# Altium PCB Demo_PCB.PcbDoc
Units mm, origin at the board's own origin, x right, y up, seen from the top; angles counter-clockwise.
Board outline 50 x 35 mm, 4 copper layers (Top Layer, Internal1, Internal2, Bottom Layer), stack 1.615 mm thick; 75 components, 63 nets, 285 pads, 185 vias.
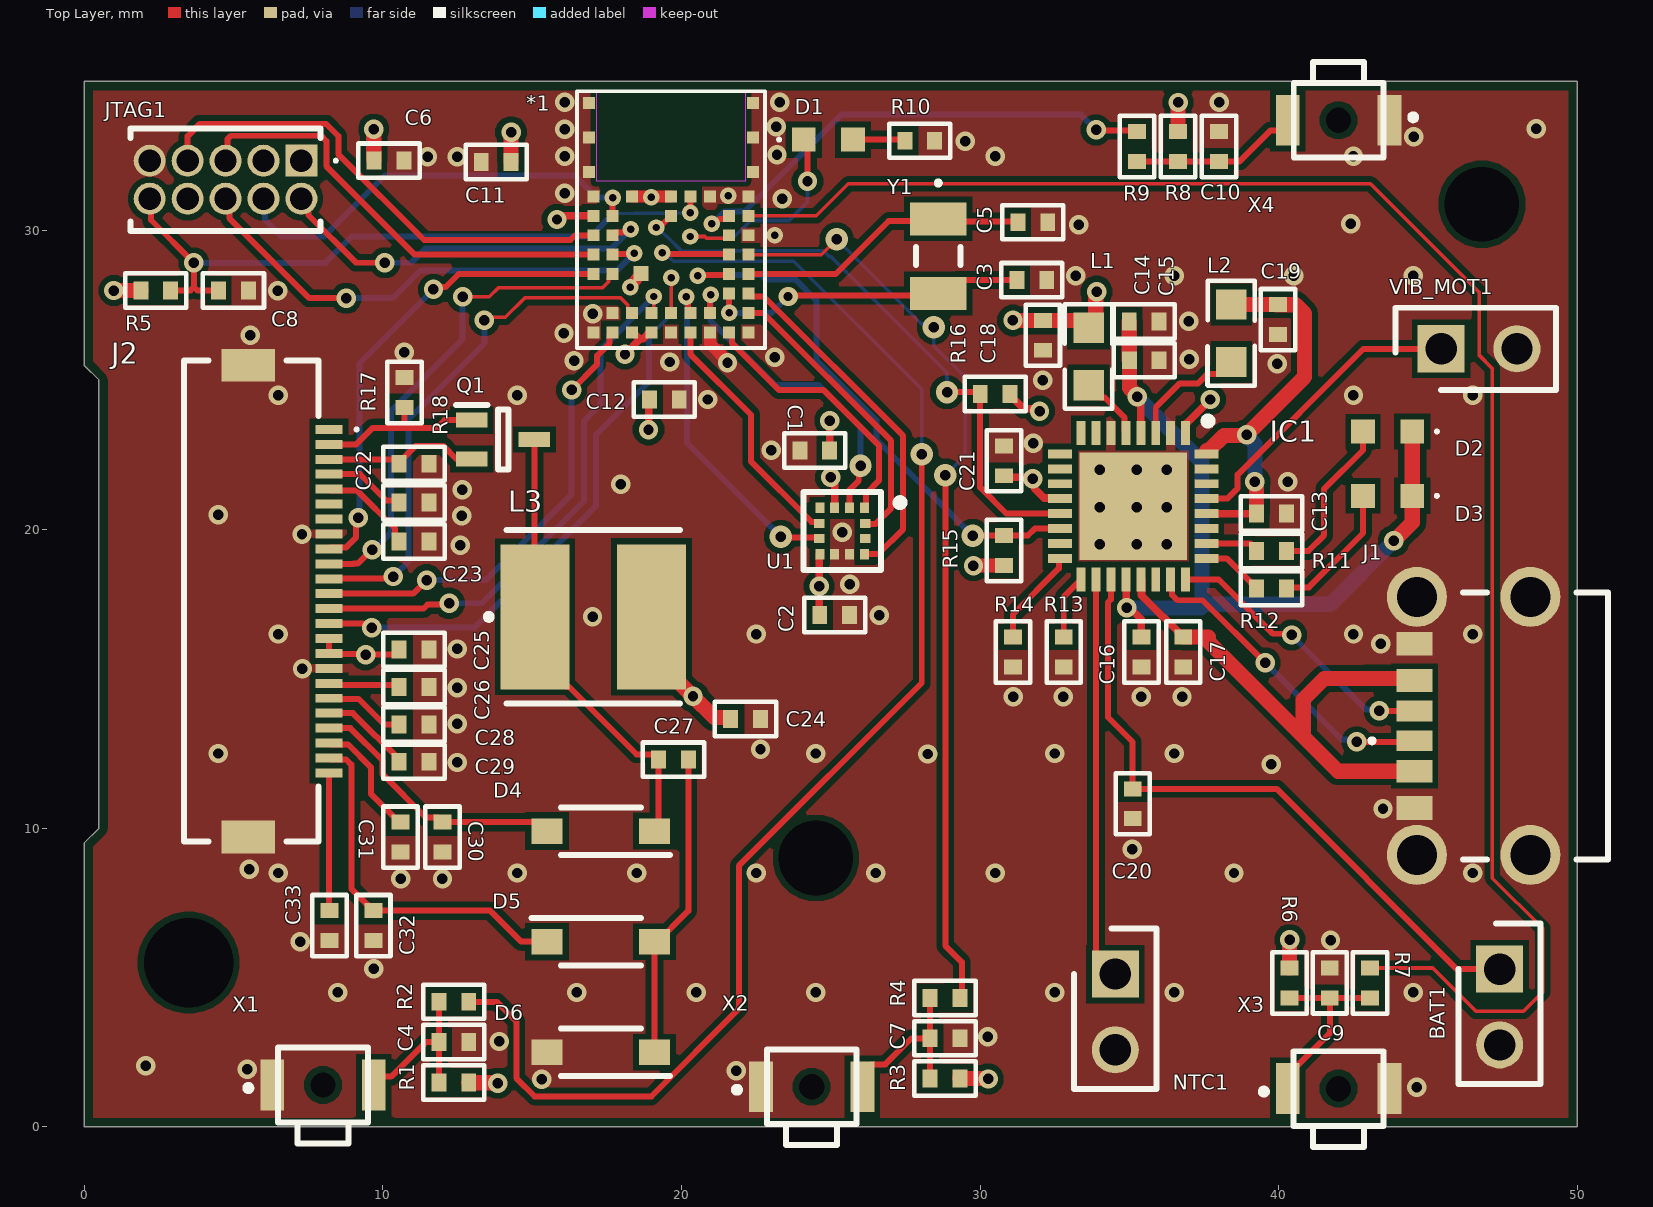
[diagram p0: Top Layer view]
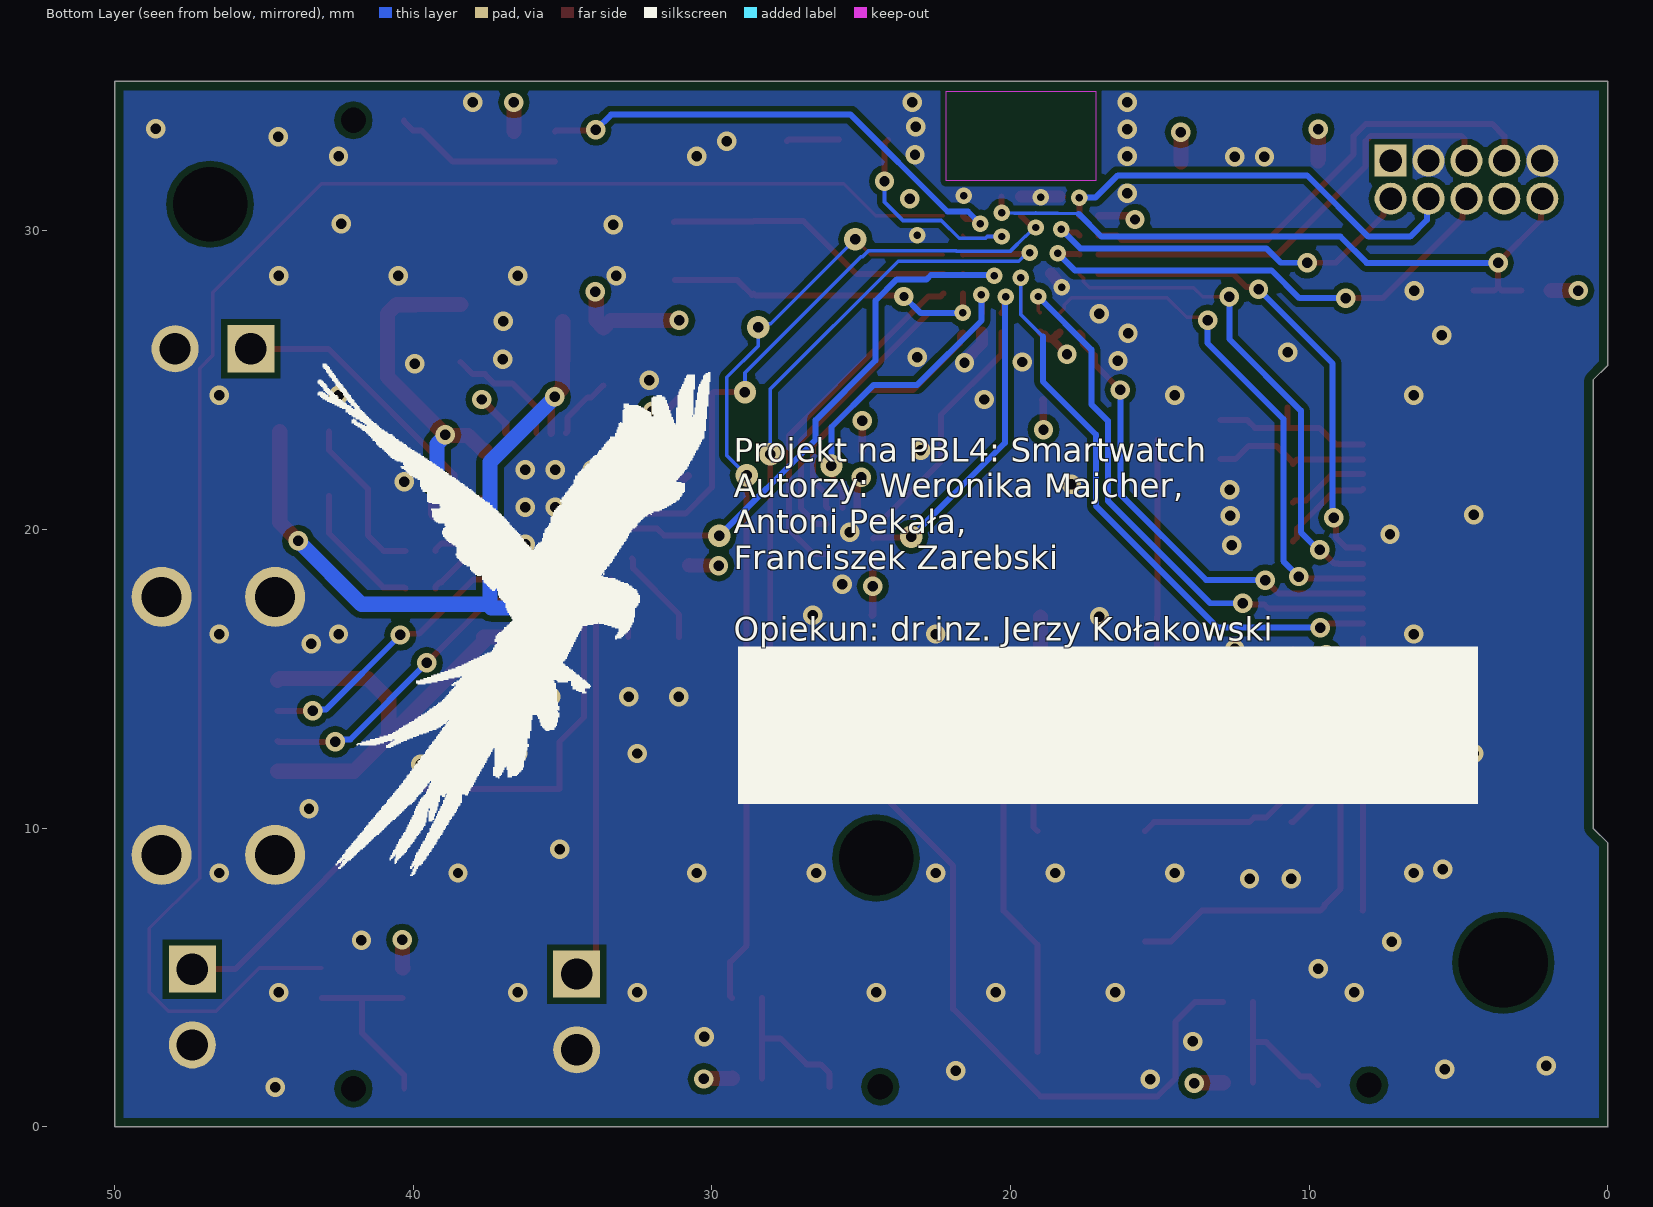
[diagram p1: Bottom Layer view, seen from below]
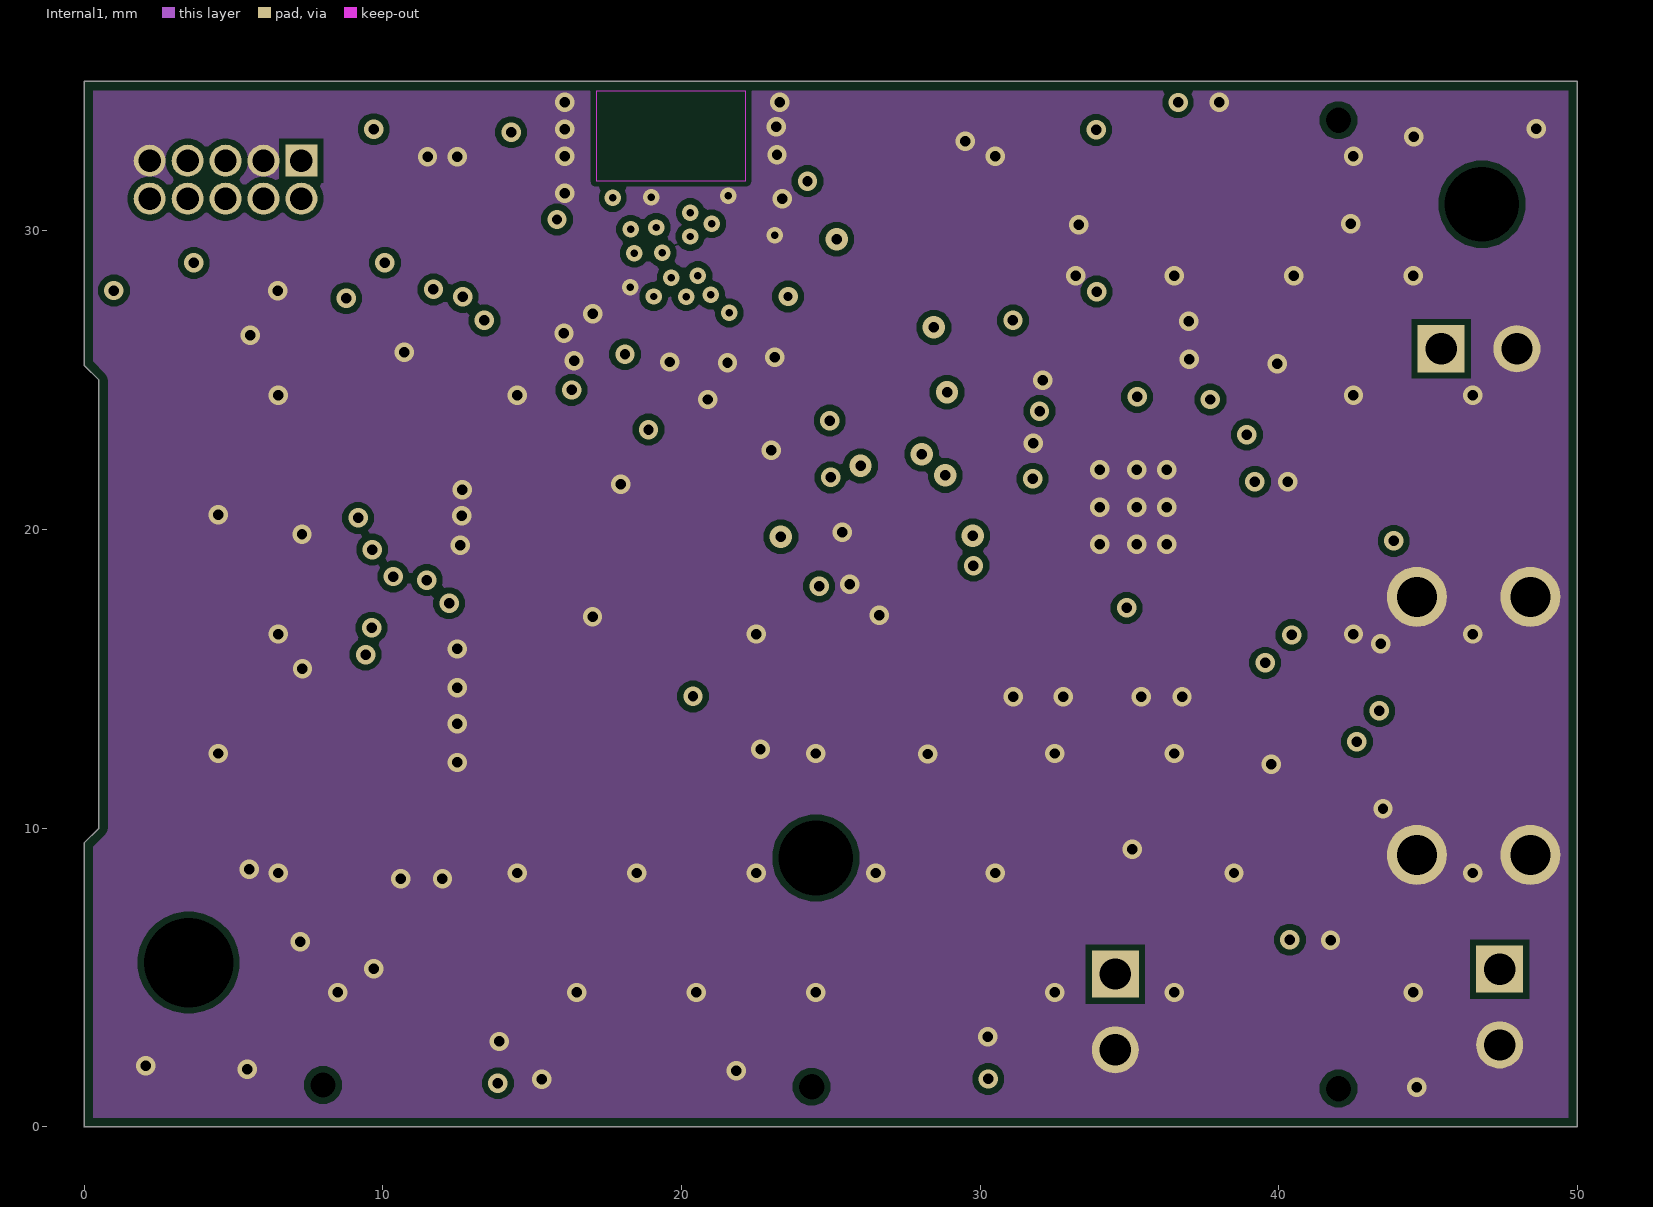
[diagram p2: Internal1]
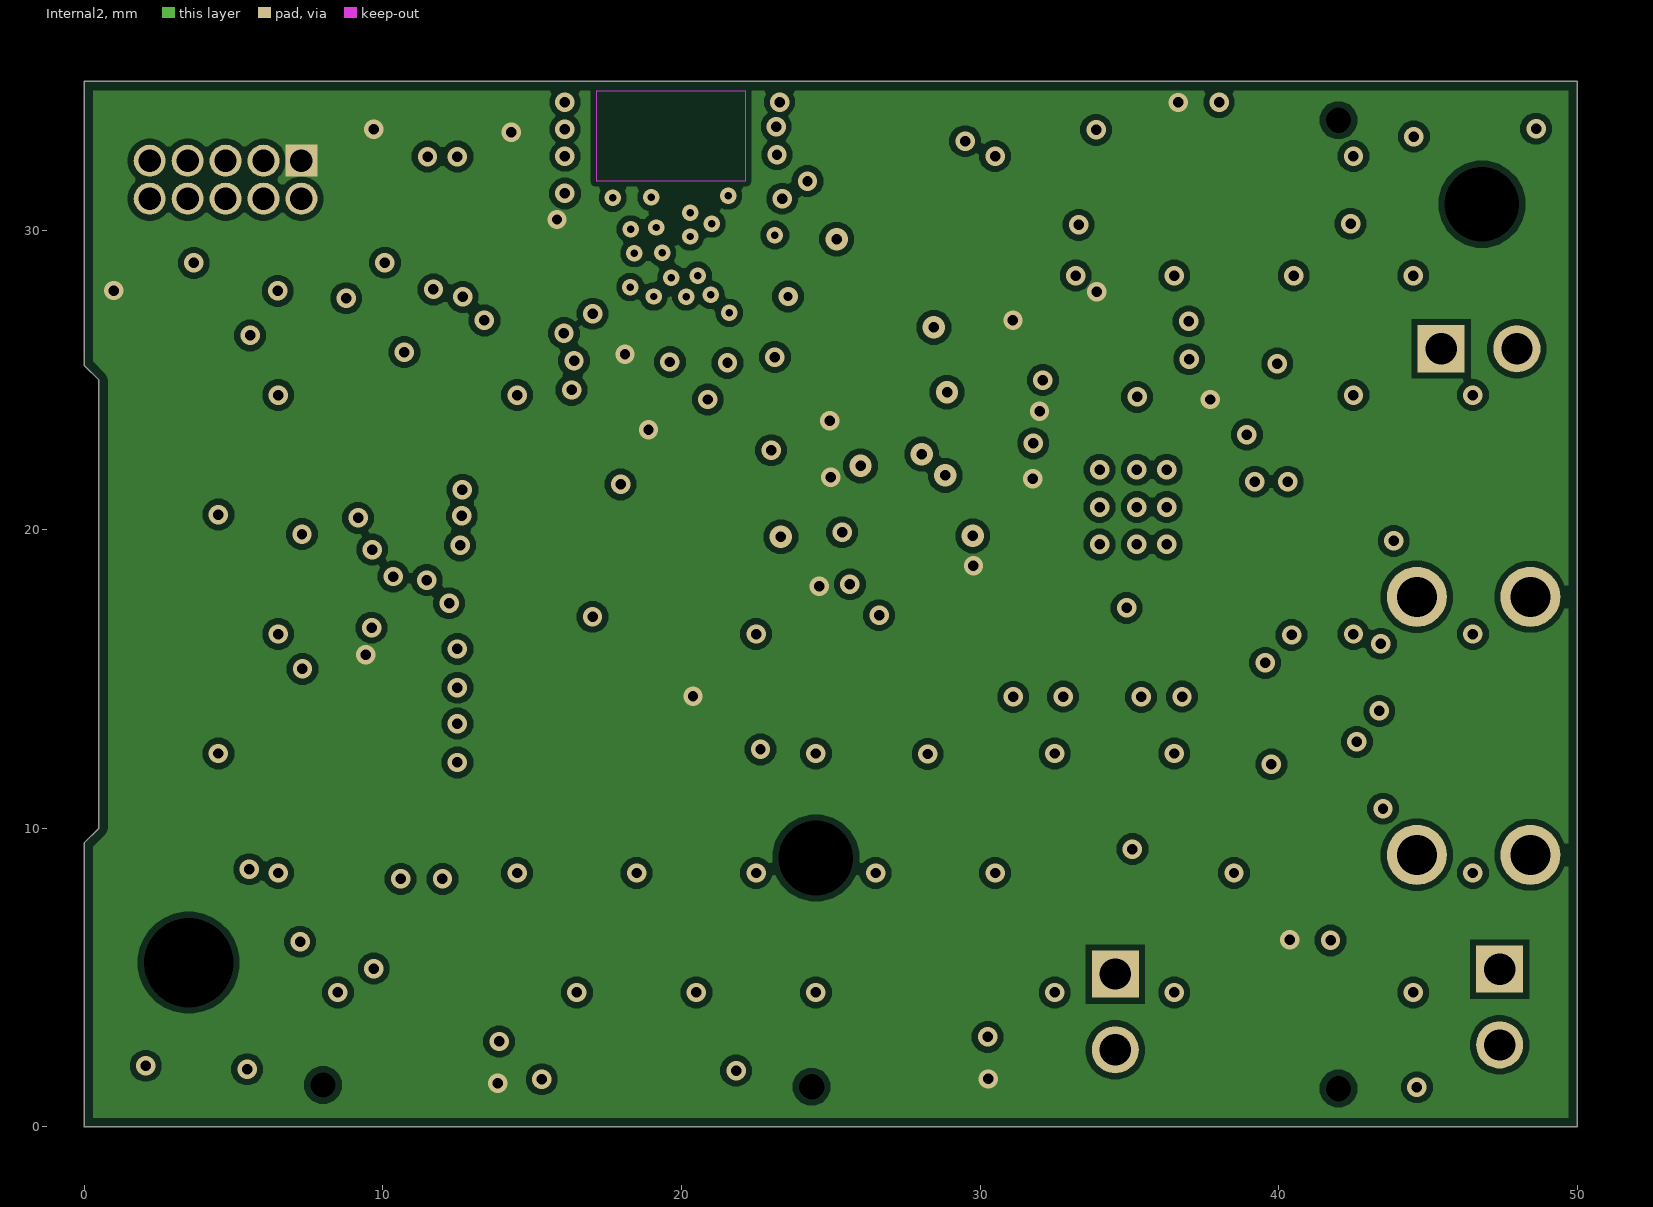
[diagram p3: Internal2]
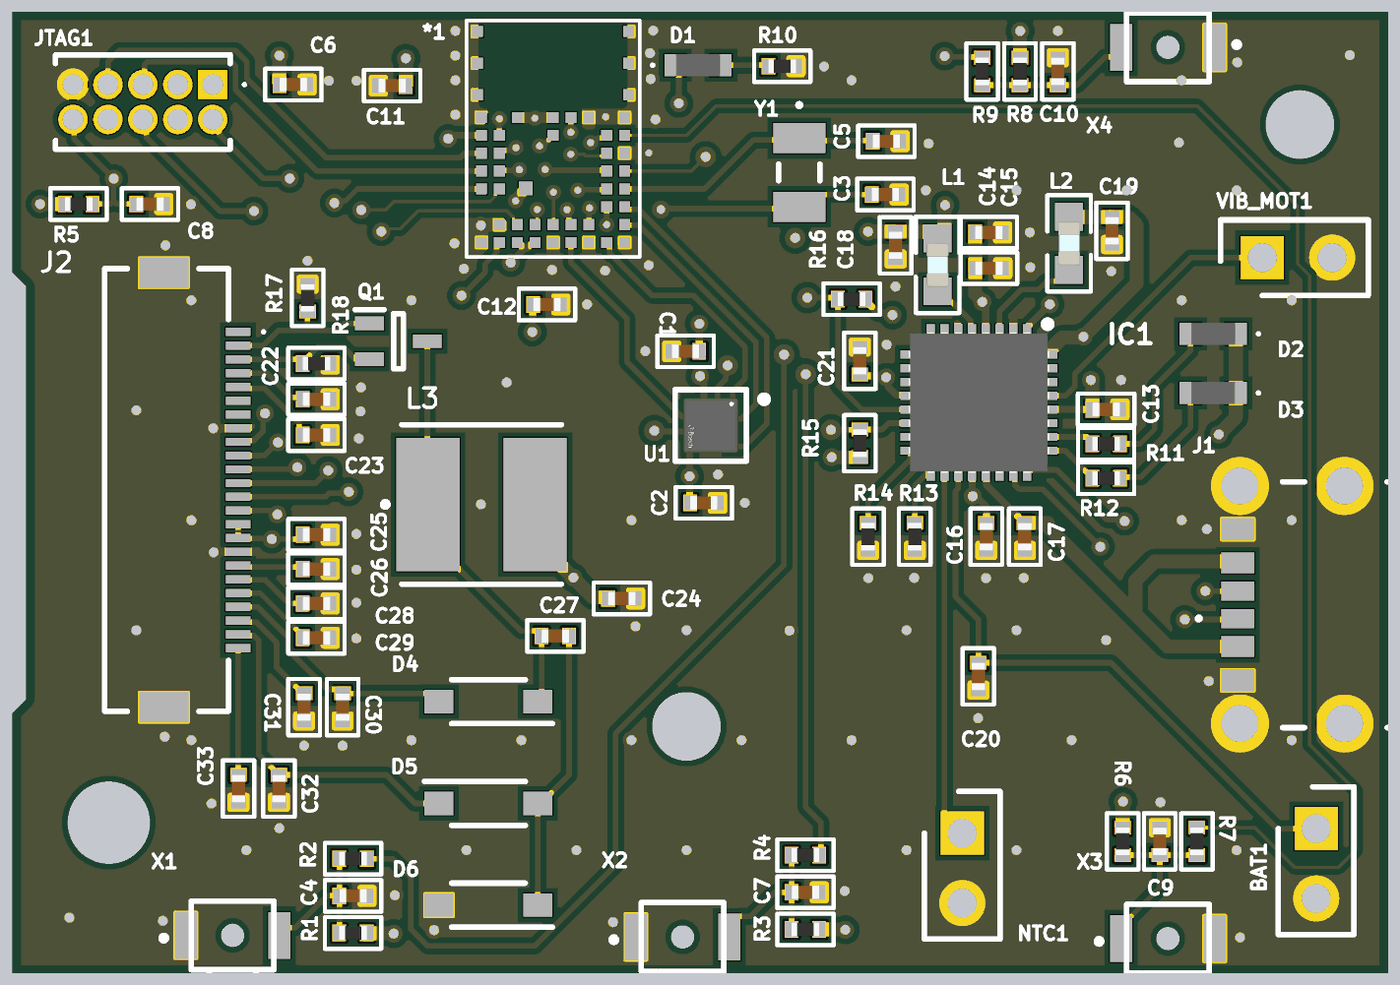
[diagram p4: 3D render of the assembled board from above, using the file's embedded part models]

## Layer stack, top to bottom
Top Solder: solder mask 0.0102, Solder Resist, Dk 3.5
Top Layer: signal copper 0.0175
Prepeg_Top1: prepreg 0.2, Dk 4.5
Prepeg_Top2: prepreg 0.2, Dk 4.5
Internal1: signal copper 0.035
Core Dielectric: core 0.71, FR4, Dk 4.8
Internal2: signal copper 0.035
Prepeg_Bottom1: prepreg 0.2, Dk 4.5
Prepeg_Bottom2: prepreg 0.2, Dk 4.5
Bottom Layer: signal copper 0.0175
Bottom Solder: solder mask 0.0102, Solder Resist, Dk 3.5

## Board outline
0,9.5 0.5,10 0.5,25 0,25.5 0,35 50,35 50,0 0.002,0 0.001,-0.001 0,0

## Design rules (kind name [scope] priority, off if disabled: settings)
BoardOutlineClearance [All] p1: gap=0.3 ignorepadtopadclearanceinfootprint=FALSE
Clearance Default [All] p1: gap=0.2 ignorepadtopadclearanceinfootprint=FALSE except(0.15: Arc-Via Track-Via SMDPad-Via THPad-Via Via-Via)
Clearance [All] p2: gap=0.12 ignorepadtopadclearanceinfootprint=FALSE except(0: Arc-Hole Track-Hole SMDPad-Hole THPad-Hole Via-Hole Fill-Hole Poly-Hole Region-Hole Text-Hole; 0.25: Track-Via Track-Fill Track-Poly Track-Region Track-Text)
HoleSize [All] p1: absolutevalues=TRUE maxlimit=6 minlimit=0.25 maxpercent=80.000 minpercent=20.000
HoleToHoleClearance [All] p1: gap=0.52 allowstackedmicrovias=TRUE
MinimumAnnularRing [All] p1: minimumring=0.15
MinimumSolderMaskSliver [All] p1: minsoldermaskwidth=0.1
PlaneClearance [All] p1: clearance=0.25
PlaneConnect [All] p1: planeconnectstyle=Relief reliefexpansion=0.2 reliefentries=4 reliefconductorwidth=0.25 reliefairgap=0.2
PolygonConnect PowerCircuits [InNet('No Net')] p1: connectstyle=Relief reliefconductorwidth=0.4 reliefentries=4 polygonreliefangle="90 Angle" airgapwidth=0.254
PolygonConnect [All] p2: connectstyle=Direct reliefconductorwidth=0.2 reliefentries=4 polygonreliefangle="45 Angle" airgapwidth=0.2
RoomDefinition zasilanie [InComponentClass('zasilanie')] p1: confinementstyle=ConfineOut formatcopy=TRUE lockcomponents=FALSE outline -27.5,-27.5 23.3,-27.5 23.3,-14.172 -27.5,-14.172
RoutingVias [All] p1: holewidth=0.35 width=0.75 viastyle="Through Hole" minholewidth=0.3 minwidth=0.7 maxholewidth=0.5 maxwidth=0.9
SilkToSilkClearance [All] p1: silktosilkclearance=0.12
SilkToSolderMaskClearance [IsPad] p1: minsilkscreentomaskgap=0.06 clearancetoexposedcopper=TRUE
SolderMaskExpansion [All] p1: expansion=0.05 istentingtop=FALSE
UnRoutedNet [All] p1: checkbadconnections=TRUE
Width [All] p1: maxlimit=1.5 minlimit=0.12 preferedwidth=0.2 midlayer1_prefwidth=0.15 midlayer2_prefwidth=0.15 minimp=50.000000 maximp=50.000000 favimp=50.000000
22 further rules are at their usual default settings.

## Classes and differential pairs
component class zasilanie: BAT1 C13 C14 C15 C16 C17 C18 C19 C20 C21 D2 D3 IC1 J1 L1 L2 NTC1 R11 R12 R13 R14 R15 R16 VIB_MOT1
component class BL653: *1 C3 C4 C5 C6 C7 C8 C9 C10 C11 C12 D1 JTAG1 R1 R2 R3 R4 R5 R6 R7 R8 R9 R10 X1 X2 X3 X4 Y1
component class accelerometer: C1 C2 U1
component class 1.54inch_e-Paper: C22 C23 C24 C25 C26 C27 C28 C29 C30 C31 C32 C33 D4 D5 D6 J2 L3 L? Q1 R17 R18

## Components (designator, comment, footprint, x,y, rotation, side; value= is the part's Value field where it differs from the comment)
*1 "BL653u" BL635U 19.65,29.168 r90 top
BAT1 "Battery" RHDR20W60P0X254_1X20_5130X250X888P 47.265,5.283 r270 top
C1 "100n" 0402_CAP_REFLOW 24.464,22.646 r180 top
C2 "100n" 0402_CAP_REFLOW 25.13,17.133 r180 top
C3 "18p" 0402_CAP_REFLOW 31.73,28.347 r180 top
C4 "100nF" 0402_CAP_REFLOW 12.381,2.838 r0 top
C5 "18p" 0402_CAP_REFLOW 31.765,30.287 r180 top
C6 "100nF" 0402_CAP_REFLOW 10.208,32.347 r0 top
C7 "100nF" 0402_CAP_REFLOW 28.825,2.966 r0 top
C8 "100nF" 0402_CAP_REFLOW 5,28 r0 top
C9 "100nF" 0402_CAP_REFLOW 41.707,4.82 r90 top
C10 "100nF" 0402_CAP_REFLOW 38,32.825 r90 top
C11 "100nF" 0402_CAP_REFLOW 13.798,32.307 r180 top
C12 "100nF" 0402_CAP_REFLOW 19.428,24.347 r0 top
C13 "10u" 0402_CAP_REFLOW 39.755,20.531 r180 top
C14 "10u" 0402_CAP_REFLOW 35.493,26.964 r0 top
C15 "10u" 0402_CAP_REFLOW 35.496,25.667 r0 top
C16 "10u" 0402_CAP_REFLOW 35.4,15.9 r270 top
C17 "1u" 0402_CAP_REFLOW 36.8,15.9 r270 top
C18 "10u" 0402_CAP_REFLOW 32.1,26.5 r270 top
C19 "10u" 0402_CAP_REFLOW 39.969,27.027 r270 top
C20 "2.2u" 0402_CAP_REFLOW 35.11,10.817 r270 top
C21 "100n" 0402_CAP_REFLOW 30.8,22.3 r90 top
C22 "1uF/ 50 V" 0402_CAP_REFLOW 11.05,20.9 r0 top
C23 "1uF/ 50 V" 0402_CAP_REFLOW 11.05,19.6 r0 top
C24 "4.7uF/50V" 0402_CAP_REFLOW 22.148,13.655 r0 top
C25 "1uF/25V" 0402_CAP_REFLOW 11.05,15.975 r0 top
C26 "1uF/ 50 V" 0402_CAP_REFLOW 11.05,14.725 r0 top
C27 "4.7uF/50V" 0402_CAP_REFLOW 19.733,12.293 r0 top
C28 "1uF/ 50 V" 0402_CAP_REFLOW 11.05,13.475 r180 top
C29 "1uF/ 50 V" 0402_CAP_REFLOW 11.05,12.225 r0 top
C30 "1uF/ 50 V" 0402_CAP_REFLOW 12,9.7 r270 top
C31 "1uF/ 50 V" 0402_CAP_REFLOW 10.6,9.7 r270 top
C32 "1uF/ 50 V" 0402_CAP_REFLOW 9.685,6.738 r270 top
C33 "1uF/ 50 V" 0402_CAP_REFLOW 8.214,6.738 r270 top
D1 "=Value" LED_G 24.92,33.051 r0 top
D2 "=Value" LED_G 43.644,23.28 r180 top
D3 "=Value" LED_G 43.642,21.127 r180 top
D4 "Diode MBR0530" SOD3716X135N 17.3,9.9 r180 top
D5 "Diode MBR0530" SOD3716X135N 17.3,6.2 r0 top
D6 "Diode MBR0530" SOD3716X135N 17.3,2.5 r180 top
IC1 "NPM1300-QEAA-R" nPM1300-QFN50P500X500X90-33N 35.13,20.781 r270 top
J1 "USB-C" USB-C 47.57,13.426 r90 top
J2 "F34G-1A7Q1-E8C24" F34G1A7Q1E8C24 5.775,17.6 r270 top
JTAG1 "20021111-00010T1LF" 2002111100010T1LF 7.278,32.347 r180 top
L1 "2.2u" 0603_IND_2.2u_30%_DCR<400m? 33.632,25.788 r90 top
L2 "2.2u" 0603_IND_2.2u_30%_DCR<400m? 38.41,26.57 r90 top
L3 "68uH" SRR5828A2R6Y 17.05,17.075 r90 top
NTC1 "Header 2" RHDR20W60P0X254_1X20_5130X250X888P 34.399,5.116 r270 top
Q1 "Si1308EDL-T1-GE3" SOT65P210X110-3N 14.028,23.011 r0 top
R1 "10k" 0402_RES_REFLOW 12.381,1.488 r180 top
R2 "1k" 0402_RES_REFLOW 12.381,4.188 r0 top
R3 "10k" 0402_RES_REFLOW 28.825,1.616 r180 top
R4 "1k" 0402_RES_REFLOW 28.825,4.316 r0 top
R5 "47K" 0402_RES_REFLOW 2.4,28 r0 top
R6 "10k" 0402_RES_REFLOW 40.357,4.82 r270 top
R7 "1k" 0402_RES_REFLOW 43.057,4.819 r90 top
R8 "10k" 0402_RES_REFLOW 36.625,32.825 r270 top
R9 "1k" 0402_RES_REFLOW 35.25,32.825 r90 top
R10 "1.69k" 0402_RES_REFLOW 27.98,33.014 r180 top
R11 "1.69k" 0402_RES_REFLOW 39.755,19.281 r180 top
R12 "1.69k" 0402_RES_REFLOW 39.755,18.031 r180 top
R13 "300k" 0402_RES_REFLOW 32.8,15.9 r90 top
R14 "300k" 0402_RES_REFLOW 31.1,15.9 r90 top
R15 "10K" 0402_RES_REFLOW 30.8,19.3 r270 top
R16 "10K" 0402_RES_REFLOW 30.504,24.54 r0 top
R17 "10K" 0402_RES_REFLOW 10.726,24.587 r270 top
R18 "3" 0402_RES_REFLOW 11.05,22.2 r0 top
U1 "BMA456" FP-BMA456-MFG 25.382,19.95 r180 top
VIB_MOT1 "vibration_motor_ODS-13807" RHDR20W60P0X254_1X20_5130X250X888P 45.433,25.923 r0 top
X1 "B3U-3000PM-B" B3U3000PMB 8,1.4 r180 top
X2 "B3U-3000PM-B" B3U3000PMB 24.359,1.342 r180 top
X3 "B3U-3000PM-B" B3U3000PMB 42,1.282 r180 top
X4 "B3U-3000PM-B" B3U3000PMB 42,33.7 r0 top
Y1 "ECS-.327-12.5-1210-TR" ECS32712534BCTR 28.6,29.15 r270 top

## Footprints (in the part's own frame and the unit in brackets; to place one, negate y for a bottom-side part, rotate by r counter-clockwise, add the part's x,y. Pads: shape width x height; smd on the part's side, far side on the other; paste and mask are expansions set on the pad)
0402_CAP_REFLOW [mm]
  rect 0.5x0.6 smd paste-0.03 mask+0.1: 1(0.5,0) 2(-0.5,0)
  silkscreen extent -1.02,-0.57 1.02,0.57, body extent -0.5,-0.25 0.5,0.25, height 0.5
0402_RES_REFLOW [mm]
  rect 0.5x0.6 smd paste-0.03 mask+0.1: 1(0.5,0) 2(-0.5,0)
  silkscreen extent -1.02,-0.57 1.02,0.57, body extent -0.5,-0.25 0.5,0.25, height 0.3
0603_IND_2.2u_30%_DCR<400m? [mil]
  rect 40x40 smd: 1(-37.89,0) 2(37.89,0)
  silkscreen extent -69,-31 69,31, body extent -31,-16 31,16, height 39
2002111100010T1LF [mm]
  rect 1.07x1.07 hole 0.75: 1(0,0)
  round 1.07 hole 0.75: 2(0,1.27) 3(1.27,0) 4(1.27,1.27) 5(2.54,0) 6(2.54,1.27) 7(3.81,0) 8(3.81,1.27) 9(5.08,0) 10(5.08,1.27)
  silkscreen extent -1.2,-1.08 5.71,2.35
B3U3000PMB [mm]
  rect 0.8x1.7 smd: 1(1.7,0) 2(-1.7,0)
  round 0.425 hole 0.85 unplated: 3(0,0)
  silkscreen extent -1.5,-1.25 2.6,1.95
BL635U [mm]
  rect 0.4x0.4 smd mask+0.051: 1(1.982,2.6) 3(1.982,1.3) 5(1.982,0) 6(1.982,-0.65) 7(1.982,-1.3) 9(1.982,-2.6) 10(1.332,-2.6) 11(0.683,-2.6) 12(0.033,-2.6) 13(-0.617,-2.6) 14(-1.267,-2.6) 15(-1.917,-2.6) 16(-2.567,-2.6) 17(-2.567,-1.95) 18(-2.567,-1.3) 19(-2.567,-0.65) 20(-2.567,0) 21(-2.567,0.65) 22(-2.567,1.3) 23(-2.567,1.95) 24(-2.567,2.6) 27(-0.617,2.6) 28(0.033,2.6) 29(0.682,2.6) 30(1.333,2.6) 31(1.332,1.95) 34(1.332,0) 37(1.333,-1.95) 38(0.682,-1.95) 39(0.033,-1.95) 40(-0.617,-1.95) 41(-1.267,-1.95) 43(-1.917,-1.3) 44(-1.917,-0.65) 45(-1.917,0) 46(-1.917,0.65) 47(-1.917,1.3) 48(-1.917,1.95) 50(-0.617,1.95) 51(0.033,1.95) 52(0.683,1.95) G2(5.107,-2.75) G3(3.957,-2.75) G4(2.807,-2.75) G5(2.808,2.75) G6(3.957,2.75) G7(5.107,2.75)
  rect 0.5x0.5 smd mask+0.051: G1(-0.592,1)
  Keep-Out Layer region: 2.507,-2.5 5.507,-2.5 5.507,2.5 2.507,2.5
  silkscreen extent -3.09,-3.15 5.51,3.15, body extent -2.77,-2.95 5.31,2.95, height 0.01
ECS32712534BCTR [mm]
  rect 1.1x1.9 smd: 1(-1.25,0) 2(1.25,0)
  silkscreen extent -2.5,-0.75 0.3,0.75
F34G1A7Q1E8C24 [mm]
  rect 0.3x0.9 smd: 1(-5.75,2.425) 2(-5.25,2.425) 3(-4.75,2.425) 4(-4.25,2.425) 5(-3.75,2.425) 6(-3.25,2.425) 7(-2.75,2.425) 8(-2.25,2.425) 9(-1.75,2.425) 10(-1.25,2.425) 11(-0.75,2.425) 12(-0.25,2.425) 13(0.25,2.425) 14(0.75,2.425) 15(1.25,2.425) 16(1.75,2.425) 17(2.25,2.425) 18(2.75,2.425) 19(3.25,2.425) 20(3.75,2.425) 21(4.25,2.425) 22(4.75,2.425) 23(5.25,2.425) 24(5.75,2.425)
  rect 1.1x1.8 smd: MP1(-7.9,-0.275) MP2(7.9,-0.275)
  silkscreen extent -8.05,-2.42 8.05,3.4
FP-BMA456-MFG [mm]
  rect 0.3x0.35 smd paste+0 mask+0: 1(-0.75,-0.775) 2(-0.25,-0.775) 3(0.25,-0.775) 4(0.75,-0.775) 7(0.75,0.775) 8(0.25,0.775) 9(-0.25,0.775) 10(-0.75,0.775)
  rect 0.35x0.3 smd paste+0 mask+0: 5(0.775,-0.25) 6(0.775,0.25) 11(-0.775,0.25) 12(-0.775,-0.25)
  silkscreen extent -2.06,-1.3 1.3,1.3, body extent -1,-1 1,1, height 0.7
LED_G [mm] "SML-LXFM0603SUGCTR"
  rect 0.8x0.8 smd: 1(-0.825,0) 2(0.825,0)
  silkscreen extent -1.7,-0.05 -1.6,0.05, body extent -0.8,-0.4 0.8,0.4, height 1.2
nPM1300-QFN50P500X500X90-33N [mm]
  rect 0.8x0.3 smd: 1(-2.45,1.75) 2(-2.45,1.25) 3(-2.45,0.75) 4(-2.45,0.25) 5(-2.45,-0.25) 6(-2.45,-0.75) 7(-2.45,-1.25) 8(-2.45,-1.75) 17(2.45,-1.75) 18(2.45,-1.25) 19(2.45,-0.75) 20(2.45,-0.25) 21(2.45,0.25) 22(2.45,0.75) 23(2.45,1.25) 24(2.45,1.75)
  rect 0.3x0.8 smd: 9(-1.75,-2.45) 10(-1.25,-2.45) 11(-0.75,-2.45) 12(-0.25,-2.45) 13(0.25,-2.45) 14(0.75,-2.45) 15(1.25,-2.45) 16(1.75,-2.45) 25(1.75,2.45) 26(1.25,2.45) 27(0.75,2.45) 28(0.25,2.45) 29(-0.25,2.45) 30(-0.75,2.45) 31(-1.25,2.45) 32(-1.75,2.45)
  rect 3.6x3.6 smd: 33(0,0)
  silkscreen extent -2.97,2.38 -2.73,2.63, body extent -2.55,-2.55 2.55,2.55, height 0.9
RHDR20W60P0X254_1X20_5130X250X888P [mm]
  rect 1.575x1.575 hole 1.05: 1(0,0.127)
  round 1.575 hole 1.05: 2(2.54,0.127)
  silkscreen extent -1.52,-1.25 3.85,1.5
SOD3716X135N [mm]
  rect 1.05x0.85 smd: 1(-1.8,0) 2(1.8,0)
  silkscreen extent -2.32,-0.8 1.34,0.8
SOT65P210X110-3N [mm]
  rect 1.05x0.5 smd: 1(-1.05,0.65) 2(-1.05,-0.65) 3(1.05,0)
  silkscreen extent -1.58,-1 0.18,1.15
SRR5828A2R6Y [mm]
  rect 4.85x2.3 smd: 1(0,1.95) 2(0,-1.95)
  silkscreen extent -2.9,-2.9 2.9,3.6
USB-C [mm]
  rect 0.7x1.2 smd: A5(-0.5,3.03) B5(0.5,3.03)
  rect 0.76x1.2 smd: A9(1.52,3.03) B9(-1.52,3.03)
  rect 0.8x1.2 smd: A12(2.75,3.03) B12(-2.75,3.03)
  round 2.01 hole 1.34: MH1(-4.32,-0.85) MH2(4.32,-0.85) MH3(-4.32,2.95) MH4(4.32,2.95)
  silkscreen extent -4.47,-3.45 4.47,4.5, body extent -4.47,-3.44 4.47,3.46, height 0.25

## Part data
BAT1: "BATTERY, Li-ion, Li-polymer, or LiFePO4", LatestRevisionDate=17-Jul-2002, LatestRevisionNote="Re-released for DXP Platform.", Publisher="Altium Limited"
C1 C2: library part CAP_100n, "Ceramic capacitor"
C3 C5: library part CAP_18p, "Ceramic capacitor"
C4 C7 C9 C10: library part CAP_0402_100nF_16V, "button"
C6 C11 C12: library part "Capacitor 100nF"
C8: library part "Capacitor 100uF"
C13 C14 C15 C16 C18 C19: library part Cap_0402_10u, "Ceramic capacitor"
C17: library part Cap_0402_1u, "Ceramic capacitor"
C20: library part Cap_0402_2.2u, "Ceramic capacitor"
C21: library part Cap_0402_100n, "Ceramic capacitor"
C22 C23 C26 C28 C29 C30 C31 C32 C33: library part "Capacitor 1uF/50V", "50 V"
C24 C27: library part "Capacitor 4.7uF/50V", "50V"
C25: library part "Capacitor 1uF/25V", "25V"
D1 D2: library part LED_G
D3: library part LED_B
IC1: "Integrated Circuit", Manufacturer_Name="Nordic Semiconductor", Mouser Part Number=949-NPM1300-QEAA-R, Datasheet Link=https://infocenter.nordicsemi.com/index.jsp?topic=%2Fstruct_pmic%2Fstruct%2Fnpm1300.html, Height=0.9mm, Manufacturer_Part_Number=NPM1300-QEAA-R, Mouser Price/Stock=https://www.mouser.co.uk/ProductDetail/Nordic-Semiconductor/nPM1300-QEAA-R?qs=3pZoU%2F6IRTiFavqFmjPoaw%3D%3D
J1: "Connector", Manufacturer_Name=Molex, Manufacturer_Part_Number=217175-0001, Mouser Part Number=538-217175-0001, Datasheet Link=https://www.molex.com/pdm_docs/sd/2171750001_sd.pdf, Height=3.46mm, Mouser Price/Stock=https://www.mouser.co.uk/ProductDetail/Molex/217175-0001?qs=DRkmTr78QARWJMiqNnldSg%3D%3D
J2: library part "FFC & FPC Connectors"
JTAG1: "Minitek127<sup></sup>,  Board to Board connector, Unshrouded Vertical Header, Through Hole, Double Row, 10 Positions, 1.27mm (0.050in) pitch.", Manufacturer_Name="Amphenol Communications Solutions", Datasheet Link=https://cdn.amphenol-cs.com/media/wysiwyg/files/drawing/20021111.pdf, Geometry.Height=5.75mm, Manufacturer_Part_Number=20021111-00010T1LF
L1 L2: library part L_0603_2.2u_30%_DCR<400mΩ, "Inductor"
L3: library part InductorA_A, "SRR5828A-680M"
NTC1: library part NTC_1%, "NTC, 10 / 47 / 100 k", LatestRevisionDate=17-Jul-2002, LatestRevisionNote="Re-released for DXP Platform.", Publisher="Altium Limited"
Q1: "MOSFET N-Ch 30V 1.5A TrenchFET SC70 Vishay Si1308EDL-T1-GE3 N-channel MOSFET Transistor, 1.5 A, 30 V, 3-Pin SC-70", Manufacturer_Name=Vishay, Mouser Part Number=78-SI1308EDL-T1-GE3, Datasheet Link=https://componentsearchengine.com/Datasheets/1/SI1308EDL-T1-GE3.pdf, Geometry.Height=1.1mm, Manufacturer_Part_Number=Si1308EDL-T1-GE3, Mouser Price/Stock=https://www.mouser.co.uk/ProductDetail/Vishay-Semiconductors/SI1308EDL-T1-GE3?qs=bX1%252BNvsK%2FBramh9tgpOaEw%3D%3D
R1 R3 R6 R8 R15 R16 R17: library part "Resistor R10K"
R2 R4 R7 R9: library part RES_0402_1k_05.%, "button"
R5: library part "Resistor R47K"
R10 R11: library part RES_0402_1.69k_1, "Resistor, green LED"
R12: library part RES_0402_1.69k, "Resistor, blue LED"
R13 R14: library part RES_0402_300k_0.05W_1%, "Resistor"
R18: library part "Resistor R3"
U1: library part CMP-191065-000002-1, "ACCEL 2-16G I2C/SPI 12LGA", Ambient Temperature Range High=+85°C, Ambient Temperature Range Low=-40°C, Frequency=1.6kHz, Manufacturer="Bosch Sensortec", Max Supply Voltage=3.6V, Min Supply Voltage=1.2V, Operating Supply Current=150uA, Package=0, Temperature="-40°C to +85°C", Accel Axis="X+Y and Z", Accel Range=2/4/8/16g, Accel Sensitivity=2048-16384LSB/g, Automotive=No, Category=IC, ComponentLink2Description=Datasheet, ComponentLink2URL=https://ae-bst.resource.bosch.com/media/_tech/media/datasheets/BST-BMA456-DS000.pdf, Device Class L1=Sensors, Device Class L2="Motion Sensors", Device Class L3=Accelerometers, Digikey Description="ACCEL 2-16G I2C/SPI 12LGA", Height=0.7mm, Lead Free=Yes, Manufacturer Part Number=BMA456, Mouser Description="BMA456 Series 3.6 V 1.6 kHz Digital Triaxial Acceleration Sensor - LGA-12", Octopart=https://octopart.com/bma456-bosch+sensortec-99488369, RoHS=TRUE, Sensor Output=I2C,SPI, Temperature Range High=+85°C, Temperature Range Low=-40°C
X1 X2 X3 X4: "Tactile Switches Side Actuate w/Boss w/out Ground Term", Manufacturer_Name="Omron Electronics", Mouser Part Number=653-B3U-3000PM-B, Geometry.Height=1.35mm, Manufacturer_Part_Number=B3U-3000PM-B, Mouser Price/Stock=https://www.mouser.co.uk/ProductDetail/Omron-Electronics/B3U-3000PM-B?qs=hnUcNC2tU0qDz9eschRYDA%3D%3D
Y1: library part CMP-40224-000006-1, "CRYSTAL 32.7680KHZ 12.5PF SMD", Frequency=32.768kHz, Load Capacitance=12.5pF, Manufacturer="ECS International", Package=ECX-1210, Temperature="-40°C to +85°C", Temperature Range High=+85°C, Temperature Range Low=-40°C, Tolerance=20ppm, Automotive=No, Category=Crys, ComponentLink2Description=Datasheet, ComponentLink2URL=https://ecsxtal.com/store/pdf/ECX-1210.pdf, Device Class L1="Passive Components", Device Class L2="Crystals / Oscillators", Device Class L3=Crystals, Digikey Description="CRYSTAL 32.7680KHZ 12.5PF SMD", Esr=90kΩ, Height=0.5mm, Lead Free=Yes, Manufacturer Part Number=ECS-.327-12.5-1210-TR, Octopart=https://octopart.com/ecs-.327-12.5-1210-tr-ecs+international-81221340, RoHS=TRUE, Series=ECX-1210

## Free pads (board coordinates)
  round 1.524 hole 2.5 unplated: 2(24.5,9) 3(46.799,30.89)
  round 1.524 hole 3 unplated: 4(3.5,5.5)

## Via types
v1: diameter 0.65, hole 0.35, Top Layer to Bottom Layer, tented both sides, 158 vias
v2: diameter 0.55, hole 0.25, Top Layer to Bottom Layer, tented both sides, 18 vias
v3: diameter 0.75, hole 0.35, Top Layer to Bottom Layer, tented both sides, 8 vias
v4: diameter 0.65, hole 0.3, Top Layer to Bottom Layer, tented both sides, 1 vias

## Nets (pads, with @x,y where several pads share a name; then routed paths per layer and width w, separated by ;. In a path a pad name is that pad's centre, name@x,y a point inside that pad or via, vN(x,y) a via of type N, cw(c..) or ccw(c..) an arc to the next point about the centre after c; other vN are vias at no path point)
B1: *1.39 R2.1 | length 48.8
  Top Layer w0.2: R2.1 13.818,4.188 14.472,3.534 14.472,1.632 15.086,1.018 18.993,1.018 21.925,3.951 21.925,8.738 28.046,14.86 v3(28.046,22.525) ; v2(19.357,29.259) 19.387,29.229 21.571,29.229 *1.39
  Bottom Layer w0.12: v2(19.357,29.259) 19.452,29.259 19.726,28.985 23.764,28.985 28.046,24.703 v3(28.046,22.525)
B2: *1.12 R4.1 | length 31.1
  Top Layer w0.12: *1.12 24.68,29.2 v3(25.198,29.718)
  Top Layer w0.2: v3(28.834,21.81) 28.834,6.066 29.387,5.513 29.387,4.378 R4.1
  Bottom Layer w0.12: v3(25.198,29.718) 28.028,26.887 28.331,26.887 v3(28.452,26.767) 28.452,26.141 29.5,25.093 29.5,22.476 v3(28.834,21.81)
B3: *1.10 R7.1 | length 57.3
  Top Layer w0.12: *1.10 24.514,30.5 25.584,31.57 43.068,31.57 46.718,27.921 46.718,25.824 47.151,25.39 47.151,8.328 48.835,6.645 48.835,4.515 48.19,3.871 46.603,3.871 45.155,5.319 R7.1
B4: *1.37 R9.1 | length 16.7
  Top Layer w0.2: v2(21.014,30.234) 21.109,30.234 21.275,30.4 21.5,30.4 *1.37 ; v1(33.883,33.379) 33.91,33.352 35.223,33.352 R9.1
  Bottom Layer w0.2: v2(21.014,30.234) 21.427,30.647 22.112,30.647 25.352,33.887 33.375,33.887 v1(33.883,33.379)
CC1: IC1.23 J1.A5 | length 10.7
  Top Layer w0.2: IC1.23 36.43,18.281 36.43,17.806 36.606,17.631 37.447,17.631 v1(39.543,15.534) ; v1(42.613,12.89) 44.505,12.89 J1.A5
  Bottom Layer w0.2: v1(39.543,15.534) 42.101,12.976 42.527,12.976 v1(42.613,12.89)
CC2: IC1.24 J1.B5 | length 9.5
  Top Layer w0.2: IC1.24 37.981,18.331 39.802,16.51 40.385,16.51 v1(40.427,16.468) ; v1(43.363,13.925) J1.B5
  Bottom Layer w0.2: v1(40.427,16.468) 42.925,13.97 43.318,13.97 v1(43.363,13.925)
GND: *1.1 *1.3 *1.5 *1.7 *1.9 *1.11 *1.16 *1.18 *1.20 *1.24 *1.48 *1.G1 *1.G2 *1.G3 *1.G4 *1.G5 *1.G6 *1.G7 BAT1.2 C1.1 C2.2 C3.2 C4.1 C5.2 C6.1 C7.1 C8.1 C9.1 C10.1 C11.1 C12.1 C13.2 C14.1 C15.1 C16.1 C17.1 C18.1 C19.1 C20.1 C21.1 C22.1 C23.1 C24.1 C25.1 C26.1 C28.2 C29.1 C30.1 C31.1 C32.1 C33.1 D6.2 IC1.2 IC1.6 IC1.33 J1.A12 J1.B12 J1.MH1 J1.MH2 J1.MH3 J1.MH4 J2.8 J2.17 J2.MP1 J2.MP2 JTAG1.3 JTAG1.9 NTC1.2 R10.2 R13.2 R14.2 R17.2 R18.1 U1.8 U1.9 VIB_MOT1.2 X1.1 X2.1 X3.2 X4.1 | length 3.2
  Top Layer w0.4: v2(18.286,28.117) 18.6,28.525 *1.G1 ; *1.3 18.964,31.15 v2(18.99,31.124) 19.016,31.15 *1.5 ; *1.18 20.95,26.23 21.542,25.638 v1(21.542,25.577)
  other v1: 44.625,1.325 15.324,1.593 21.831,1.881 5.461,1.928 2.065,2.045 13.897,2.859 30.253,3.012 8.5,4.5 16.5,4.5 20.5,4.5 24.5,4.5 32.5,4.5 36.5,4.5 44.5,4.5 9.7,5.3 7.233,6.196 41.732,6.245 10.6,8.3 12,8.3 6.5,8.5 14.5,8.5 18.5,8.5 22.5,8.5 26.5,8.5 30.5,8.5 38.5,8.5 46.5,8.5 5.531,8.624 35.1,9.3 43.489,10.649 39.754,12.138 12.5,12.2 28.245,12.483 4.5,12.5 24.5,12.5 32.5,12.5 36.5,12.5 22.648,12.639 12.5,13.5 31.108,14.394 35.392,14.394 32.78,14.404 36.76,14.404 12.5,14.7 7.313,15.333 12.5,16 43.417,16.176 6.5,16.5 22.5,16.5 42.5,16.5 46.5,16.5 17.024,17.077 26.618,17.131 25.643,18.165 12.589,19.47 34,19.5 35.25,19.5 36.25,19.5 7.297,19.843 25.378,19.908 12.647,20.459 4.5,20.5 34,20.75 35.25,20.75 36.25,20.75 12.668,21.33 17.963,21.511 40.3,21.6 34,22 35.25,22 36.25,22 23.004,22.653 31.778,22.884 20.884,24.351 6.5,24.5 14.5,24.5 42.5,24.5 46.5,24.5 32.1,25 39.947,25.555 19.615,25.607 16.405,25.647 37,25.7 23.128,25.772 10.723,25.937 5.558,26.497 16.068,26.573 36.982,26.97 17.028,27.222 6.487,27.987 33.2,28.5 36.5,28.5 40.5,28.5 44.5,28.5 33.3,30.2 42.404,30.236 23.374,31.075 16.1,31.25 11.5,32.484 12.5,32.484 16.1,32.5 30.5,32.5 42.5,32.5 23.2,32.55 29.5,33 44.521,33.153 16.1,33.4 48.613,33.416 23.173,33.489 16.1,34.3 23.289,34.309 38,34.3
  other v2: 23.128,29.857 21.561,31.172
LED: *1.38 D1.1 | length 8
  Top Layer w0.12: v2(20.291,29.809) 20.78,29.809 20.84,29.749 21.499,29.749 *1.38
  Top Layer w0.2: D1.1@24.106,33.04 24.22,32.925 v1(24.22,31.661)
  Bottom Layer w0.12: v2(20.291,29.809) 20.78,29.809 20.84,29.749 21.723,29.749 22.319,30.345 23.603,30.345 24.22,30.962 v1(24.22,31.661)
Net*1_14: *1.14 U1.10 | length 11.9
  Top Layer w0.2: *1.14 22.343,27.807 22.75,27.807 27.421,23.136 27.421,20.014 26.582,19.175 U1.10
Net*1_15: *1.15 U1.12 | length 9.9
  Top Layer w0.2: *1.15 22.259,27.241 22.75,27.241 27.021,22.97 27.021,20.715 26.497,20.191 26.166,20.191 U1.12
Net*1_17: *1.17 U1.1 | length 9
  Top Layer w0.2: *1.17 21.7,26.5 21.7,26.233 23.26,24.672 24.753,24.672 26.621,22.804 26.621,21.643 26.178,21.2 26.178,20.77 U1.1
Net*1_19: *1.19 U1.5 | length 8.3
  Top Layer w0.2: *1.19 20.3,25.871 22.337,23.834 22.337,22.27 24.358,20.25 24.557,20.25 U1.5
Net*1_23: *1.23 J2.12 | length 15.5
  Top Layer w0.2: J2.12 11.018,17.85 v1(11.475,18.307) ; v1(16.322,24.671) 17.18,25.528 17.18,25.821 17.6,26.241 17.6,26.5 *1.23
  Bottom Layer w0.2: v1(11.475,18.307) 13.451,18.307 16.322,21.178 v1(16.322,24.671)
Net*1_27: *1.27 J2.9 | length 16
  Top Layer w0.2: J2.9 8.25,19.4 8.774,19.4 9.111,19.737 9.111,20.323 v1(9.175,20.387) ; v1(11.699,28.038) 11.777,28.117 12.104,28.117 12.538,28.55 *1.27
  Bottom Layer w0.2: v1(9.175,20.387) 9.216,20.428 9.216,25.556 v1(11.699,28.038)
Net*1_43: *1.43 U1.2 | length 10.8
  Top Layer w0.2: *1.43 20.963,27.263 20.963,27.841 v2(20.975,27.854) ; U1.2 25.632,21.329 25.937,21.634 25.937,22.069 v3(25.996,22.129)
  Bottom Layer w0.2: v2(20.975,27.854) 20.975,26.993 23.127,24.841 24.585,24.841 25.996,23.429 v3(25.996,22.129)
Net*1_44: *1.44 U1.6 | length 11.3
  Top Layer w0.2: v2(20.159,27.796) 20.226,27.729 20.226,27.324 *1.44 ; v3(23.33,19.756) 23.358,19.728 24.579,19.728 U1.6
  Bottom Layer w0.2: v2(20.159,27.796) 20.19,27.765 20.19,22.895 v3(23.33,19.756)
Net*1_45: *1.45 J2.14 | length 20.6
  Top Layer w0.12: *1.45 19.665,27.39 19.665,27.825 cw(c20.15,27.825) 19.665,27.832 19.674,28.427 v2(19.665,28.427)
  Top Layer w0.2: J2.14 9.346,16.85 9.483,16.712 v1(9.627,16.712)
  Bottom Layer w0.12: 18.914,26.457 19.665,27.208 v2(19.665,28.427)
  Bottom Layer w0.2: v1(9.627,16.712) 13.065,16.712 17.148,20.795 17.148,23.182 18.914,24.948 18.914,26.457
Net*1_46: *1.46 J2.13 | length 18.4
  Top Layer w0.12: *1.46 19.075,27.325 v2(19.075,27.8)
  Top Layer w0.2: J2.13 11.366,17.35 11.497,17.481 12.173,17.481 v1(12.222,17.531)
  Bottom Layer w0.2: v1(12.222,17.531) 13.318,17.531 16.745,20.958 16.745,23.641 17.295,24.191 17.295,26.02 v2(19.075,27.8)
Net*1_47: *1.47 J2.11 | length 17.5
  Top Layer w0.12: v1(13.406,27) 13.507,27.102 14.106,27.102 14.761,27.757 17.961,27.757 18.21,27.508 18.21,27.39 *1.47
  Top Layer w0.2: J2.11@8.208,18.358 10.287,18.358 v1(10.354,18.425)
  Bottom Layer w0.2: v1(10.354,18.425) 10.867,18.938 10.867,23.7 13.406,26.239 v1(13.406,27)
Net*1_50: *1.50 J2.10 | length 16.8
  Top Layer w0.12: v1(12.676,27.787) 13.571,27.787 13.874,28.09 16.387,28.09 17.358,28.09 17.56,28.292 17.56,28.41 *1.50
  Top Layer w0.2: J2.10 9.015,18.85 9.022,18.856 9.163,18.856 9.634,19.327 v1(9.647,19.327)
  Bottom Layer w0.2: v1(9.647,19.327) 9.694,19.327 10.281,19.913 10.281,23.981 12.676,26.376 v1(12.676,27.787)
NetBAT1_1: BAT1.1 C20.2 IC1.19 | length 22.2
  Top Layer w0.2: IC1.19 34.38,17.663 34.28,17.563 34.28,13.714 35.11,12.884 C20.2 39.925,11.317 45.96,5.283 BAT1.1
NetC4_2: C4.2 R1.1 R2.2 X1.2 | length 5.4
  Top Layer w0.2: X1.2 9.982,1.682 10.283,1.682 11.439,2.838 C4.2 R2.2 ; R1.1 C4.2@11.881,2.788
NetC7_2: C7.2 R3.1 R4.2 X2.2 | length 5.9
  Top Layer w0.2: X2.2 26.059,1.792 26.359,2.092 26.83,2.092 27.704,2.966 C7.2 ; R3.1 C7.2 ; R4.2 C7.2
NetC9_2: C9.2 R6.1 R7.2 X3.1 | length 6.3
  Top Layer w0.2: X3.1 40.3,1.732 41.707,3.139 C9.2 ; R6.1 C9.2 ; R7.2 C9.2
NetC10_2: C10.2 R8.1 R9.2 X4.2 | length 5.6
  Top Layer w0.2: R9.2 R8.1 C10.2 38.688,32.325 39.717,33.355 40,33.355 40.3,33.655 X4.2
NetC22_2: C22.2 J2.4 | length 2.7
  Top Layer w0.2: J2.4 9.239,21.85 10.117,20.972 10.478,20.972 C22.2
NetC23_2: C23.2 J2.5 | length 3.2
  Top Layer w0.2: J2.5 8.25,21.3 9.146,21.3 10.411,20.035 10.411,19.739 C23.2
NetC26_2: C26.2 J2.18 | length 2.4
  Top Layer w0.2: J2.18 8.25,14.8 8.667,14.8 10.475,14.8 C26.2
NetC27_1: C27.1 D5.2 D6.1 | length 10.3
  Top Layer w0.2: D6.1 19.1,6.1 20.233,7.233 C27.1
NetC27_2: C27.2 D4.1 L3.1 Q1.3 | length 15.3
  Top Layer w0.2: Q1.3 15.078,17.097 L3.1 15.1,15.8 16.15,14.75 16.219,14.75 18.496,12.473 19.083,12.473 19.233,12.323 C27.2 ; D4.1 19.233,10.033 C27.2@19.233,12.343
NetC28_1: C28.1 J2.19 | length 2.7
  Top Layer w0.2: J2.19 8.225,14.325 9.193,14.325 10.043,13.475 C28.1
NetC29_2: C29.2 J2.20 | length 3.1
  Top Layer w0.2: J2.20 9.002,13.85 10.565,12.287 C29.2@10.565,12.237
NetC30_2: C30.2 D4.2 J2.21 | length 9
  Top Layer w0.2: J2.21 8.917,13.35 10,12.267 10,11.801 11.451,10.35 11.85,10.35 C30.2 15.2,10.2 D4.2
NetC31_2: C31.2 J2.22 | length 4
  Top Layer w0.2: J2.22 8.25,12.8 8.84,12.8 9.6,12.04 9.6,11.15 10.55,10.2 C31.2
NetC32_2: C32.2 D5.1 J2.23 | length 12.3
  Top Layer w0.2: J2.23 8.25,12.3 8.774,12.3 8.95,12.124 8.95,7.973 9.485,7.438 9.485,7.388 9.635,7.238 C32.2 13.598,7.238 14.636,6.2 D5.1
NetC33_2: C33.2 J2.24 | length 4.6
  Top Layer w0.2: J2.24 8.2,7.251 C33.2
NetD1_2: D1.2 R10.1 | length 1.8
  Top Layer w0.2: D1.2 27.443,33.051 R10.1
NetD2_2: D2.2 R11.2 | length 5.5
  Top Layer w0.2: R11.2 40.992,19.281 41.519,19.808 41.519,21.358 42.819,22.657 D2.2
NetD3_2: D3.2 R12.2 | length 4.6
  Top Layer w0.2: R12.2 40.29,18.065 41.004,18.065 42.817,19.879 D3.2
NetIC1_3: IC1.3 L2.1 | length 4
  Top Layer w0.2: IC1.3 35.88,24.09 36.685,24.895 37.298,24.895 37.602,25.2 38.002,25.2 L2.1
NetIC1_5: IC1.5 L1.1 | length 2.2
  Top Layer w0.2: L1.1 34.04,24.418 34.167,24.418 34.83,23.755 34.83,23.281 IC1.5
NetIC1_25: IC1.25 R12.1 | length 2.1
  Top Layer w0.203: IC1.25 38.255,19.031 39.057,18.229 39.107,18.229 39.255,18.081 R12.1
NetIC1_26: IC1.26 R11.1 | length 1.8
  Top Layer w0.203: IC1.26 39.055,19.531 39.255,19.331 R11.1
NetIC1_29: IC1.29 VIB_MOT1.1 | length 10.2
  Top Layer w0.2: IC1.29 38.28,21.031 38.625,21.376 38.625,21.838 42.837,26.05 VIB_MOT1.1
NetJ2_2: J2.2 Q1.1 R17.1 | length 5.8
  Top Layer w0.2: J2.2 9.11,22.85 9.665,23.405 10.726,23.405 10.803,23.405 ; 10.726,23.482 10.803,23.405 ; 10.726,23.5 R17.1 ; Q1.1 12.072,23.661 11.817,23.405 10.803,23.405
NetJ2_3: J2.3 Q1.2 R18.2 | length 5.3
  Top Layer w0.2: J2.3 10.4,22.35 R18.2 10.55,22.25 11.1,22.8 12.025,22.8 12.464,22.361 Q1.2
nRESET: *1.6 C8.2 JTAG1.10 R5.1 | length 23
  Top Layer w0.2: JTAG1.10@2.06,30.9 2.241,30.719 2.241,30.359 v1(3.675,28.925) 3.675,28.117 ; R5.1 3.558,28 3.675,28.117 ; C8.2 3.792,28 3.675,28.117 ; v2(20.294,30.609) 20.297,30.612 20.297,31.147 *1.6
  Bottom Layer w0.12: 17.719,30.566 18.427,30.59 cw(c18.443,30.105) 18.444,30.59 19.153,30.595 cw(c19.157,30.11) 19.159,30.595 19.779,30.592 19.878,30.592 v2(20.294,30.609)
  Bottom Layer w0.2: v1(3.675,28.925) 7.49,28.925 8.078,28.925 8.956,29.803 16.956,29.803 17.719,30.566
NTC: IC1.18 NTC1.1 | length 13.5
  Top Layer w0.2: IC1.18 33.88,5.763 NTC1.1
RX: *1.29 JTAG1.7 | length 16.6
  Top Layer w0.2: JTAG1.7 3.468,33.171 3.879,33.582 8.103,33.582 8.513,33.172 8.513,32.568 11.391,29.69 16.28,29.69 16.44,29.85 *1.29
SCL: *1.40 IC1.14 R15.2 | length 18.5
  Top Layer w0.2: v2(20.55,28.5) 20.575,28.525 21.575,28.525 *1.40 ; v3(29.753,19.788) 29.759,19.794 30.794,19.794 R15.2 31.6,19.8 31.83,20.031 IC1.14
  Bottom Layer w0.2: v2(20.55,28.5) 20.568,28.518 22.665,28.518 22.809,28.375 23.808,28.375 24.522,27.661 24.522,25.665 26.527,23.661 26.527,23.014 v3(29.753,19.788)
SDA: *1.34 IC1.13 R16.2 | length 20.3
  Top Layer w0.2: v2@19.327,30.177 *1.34 ; v3(28.892,24.595) 29.949,24.595 R16.2 30.004,21.409 30.882,20.531 IC1.13
  Bottom Layer w0.12: v2(19.157,30.11) 19.2,30.11 19.496,29.815 19.506,29.815 20,29.321 21.815,29.321 21.823,29.33 24.759,29.33 24.956,29.133 25.007,29.133 28.892,25.248 v3@28.892,24.669 ; v3@28.966,24.669 v3@29.18,24.669
SWCLK: *1.31 JTAG1.4 | length 14.4
  Top Layer w0.2: *1.31 v2(17.7,31.102)
  Bottom Layer w0.2: JTAG1.4 6.065,31.02 6.065,30.359 6.62,29.804 8.02,29.804 10.075,31.859 16.41,31.859 17.15,31.119 17.683,31.119 v2(17.7,31.102)
SWDIO: *1.52 JTAG1.2 | length 13.2
  Top Layer w0.2: JTAG1.2@7.14,30.9 7.22,30.9 7.511,30.609 7.511,30.529 9.11,28.93 v1(10.075,28.93) ; *1.52 17.8,29.95 18.073,29.95 18.173,30.05 v2(18.3,30.05)
  Bottom Layer w0.2: v1(10.075,28.93) 10.956,28.93 11.43,29.403 17.653,29.403 v2(18.3,30.05)
SWO: *1.51 JTAG1.6 | length 16.7
  Top Layer w0.2: JTAG1.6 4.864,30.951 4.864,30.422 7.543,27.743 v1(8.777,27.743) ; *1.51 17.725,29.225 18.4,29.225 v2(18.425,29.25)
  Bottom Layer w0.2: v1(8.777,27.743) 10.335,27.743 11.265,28.673 17.848,28.673 v2(18.425,29.25)
TX: *1.28 JTAG1.5 | length 15.2
  Top Layer w0.2: JTAG1.5 4.801,32.41 4.801,33.065 4.918,33.182 7.937,33.182 8.113,33.007 8.113,32.165 11.078,29.2 *1.28
VBUS: C17.2 IC1.21 J1.A9 J1.B9 | length 17.5
  Top Layer w0.254: IC1.21 35.403,18.308 35.403,17.795 35.594,17.604 35.596,17.604 36.627,16.573 36.627,16.523 36.75,16.4 C17.2
  Top Layer w0.508: C17.2 37.636,16.4 37.636,16.254 40.82,13.07 ; J1.B9 41.984,11.906 40.82,13.07 ; J1.A9 44.478,15.008 42.826,15.008 41.521,15.008 40.82,14.307 40.82,13.07
Vcc: *1.21 *1.22 *1.30 C1.2 C2.1 C6.2 C11.2 C12.2 C18.2 C21.2 C24.2 C25.2 IC1.1 IC1.12 J2.15 J2.16 JTAG1.1 L1.2 L3.2 R1.2 R3.2 R5.2 R6.2 R8.2 R15.1 R16.1 U1.3 U1.7 | length 32.3
  Top Layer w0.2: JTAG1.1@7.14,32.17 JTAG1.1@7.154,32.184 ; J2.15 J2.16 8.219,15.831 9.406,15.831 v1(9.425,15.812) 10.4,15.812 10.55,15.962 C25.2
  Top Layer w0.254: v1(15.835,30.378) 15.942,30.378 16.064,30.5 *1.30 ; v1(18.111,25.868) v1@18.142,25.838 ; v1@18.115,25.867 18.609,26.361 18.609,26.378 18.46,26.527 18.423,26.527 *1.22 ; 18.717,26.392 18.851,26.527 18.927,26.527 *1.21 ; v1(18.898,23.345) 18.913,23.36 18.913,24.332 C12.2 ; v1@24.621,18.338 24.621,19.163 U1.7 ; v1@24.623,18.108 v1(24.611,18.097) 24.621,18.088 24.621,17.143 C2.1 ; v1(24.967,23.646) v1(24.967,23.646) 24.965,22.633 C1.2@24.974,22.624 ; v1(24.994,21.742) 24.994,21.635 25.132,21.497 U1.3 ; C21.2 30.923,21.677 30.923,21.699 30.973,21.749 31.707,21.749 v1(31.758,21.697) ; R16.1 31.004,24.49 31.454,24.04 31.914,24.04 v1(31.99,23.964) ; v1@31.831,21.658 31.831,21.367 32.144,21.054 32.657,21.054 IC1.12 ; IC1.1 36.903,23.254 36.903,23.547 v1(37.708,24.352)
  Top Layer w0.483: v1(29.777,18.791) 29.782,18.796 30.753,18.796 R15.1@30.754,18.797
  Top Layer w0.508: v1(1,28) R5.2 ; v1(9.7,33.4) 9.7,33.336 9.698,33.334 9.698,32.399 9.708,32.389 C6.2 ; R1.2 12.881,1.479 12.885,1.475 13.844,1.475 v1(13.856,1.463) ; C11.2@14.3,32.309 v1(14.3,33.3) ; L3.2 19,15.8 v1(20.387,14.413) 21.099,13.701 21.644,13.701 21.648,13.697 C24.2 ; R3.2@29.321,1.629 29.321,1.62 R3.2 30.259,1.616 v1(30.271,1.604) ; v1(31.1,27) C18.2 32.104,26.996 33.386,26.996 L1.2 33.873,26.992 33.873,27.936 v1(33.901,27.963) ; R8.2 36.627,33.327 v1(36.628,34.296) v1(36.628,34.296) ; R6.2@40.344,5.316 40.353,5.316 R6.2 40.357,6.253 v1(40.369,6.266)
VOUT2: C13.1 C19.2 IC1.28 IC1.32 L2.2 | length 13.5
  Top Layer w0.254: IC1.28 C13.1 C13.1@39.258,20.534
  Top Layer w0.508: IC1.32@37.58,22.635 37.651,22.635 38.165,23.148 38.903,23.148 v1(38.93,23.175) 40.86,25.105 40.86,27.229 40.562,27.527 39.927,27.527 39.921,27.533 L2.2 ; v1(39.2,21.6) 39.2,21.562 39.255,21.507 39.255,20.537 C13.1@39.258,20.534
  Bottom Layer w0.508: v1(38.93,23.175) 38.93,23.137 39.2,22.866 v1(39.2,21.6)
VSET1: IC1.17 R13.1 | length 2.2
  Top Layer w0.2: R13.1 32.8,17.751 IC1.17
VSET2: IC1.16 R14.1 | length 3.3
  Top Layer w0.2: R14.1 31.1,17.161 32.637,18.698 32.637,18.988 IC1.16
VSYS: C14.2 C15.2 C16.2 D2.1 D3.1 IC1.4 IC1.20 | length 27.6
  Top Layer w0.254: IC1.20 34.892,18.318 34.892,17.387 v1(34.904,17.375) ; v1@34.964,17.425 34.964,17.422 35.087,17.299 35.09,17.299 35.4,16.989 C16.2 ; v1(35.255,24.438) 35.257,24.316 35.38,24.193 IC1.4
  Top Layer w0.508: C14.2 34.994,26.963 34.994,25.669 C15.2 34.996,24.735 35.255,24.476 v1(35.255,24.438) ; v1(43.85,19.618) 44.467,20.236 D3.1 ; D3.1@44.468,21.127 D2.1
  Bottom Layer w0.508: v1(34.904,17.375) 37.386,17.375 ; v1(35.255,24.438) v1(35.255,24.438) 37.432,22.262 37.432,17.495 41.726,17.495 v1(43.85,19.618)
XL1: *1.41 C3.1 Y1.2 | length 10.7
  Top Layer w0.2: v2(21.6,27.25) *1.41 ; v4(23.57,27.8) 23.602,27.833 28.533,27.833 Y1.2 ; Y1.2@28.649,27.851 29.146,28.347 C3.1
  Bottom Layer w0.2: v2(21.6,27.25) 23.02,27.25 v4(23.57,27.8)
XL2: *1.13 C5.1 Y1.1 | length 9.8
  Top Layer w0.2: *1.13 25.159,28.55 26.934,30.325 28.596,30.325 28.61,30.311 31.241,30.311 C5.1
pads on no net: IC1.7 IC1.8 IC1.9 IC1.10 IC1.11 IC1.15 IC1.22 IC1.27 IC1.30 IC1.31 J2.1 J2.6 J2.7 JTAG1.8 U1.4 U1.11 X1.3 X2.3 X3.3 X4.3

## Polygon pours and split planes (outlines as drawn)
GND on Internal1 "GND_L02_P003" (solid, pour order 3): 0,9.5 0.5,10 0.5,25 0,25.5 0,35 50,35 50,0 0.002,0 0.001,-0.001 0,0
Vcc on Internal2 "VCC_2.7" (solid, pour order 6): 0,9.5 0.5,10 0.5,25 0,25.5 0,35 50,35 50,0 0.002,0 0.001,-0.001 0,0
GND on Top Layer "GND_2" (solid, pour order 7): 0,9.5 0.5,10 0.5,25 0,25.5 0,35 50,35 50,0 0.002,0 0.001,-0.001 0,0
GND on Bottom Layer "GND_L04_P008" (solid, pour order 8): 0,9.5 0.5,10 0.5,25 0,25.5 0,35 50,35 50,0 0.002,0 0.001,-0.001 0,0

## Silkscreen, mask and mechanical layers (free items; w line width, h text height)
Bottom Overlay:
  drawing of 6 lines, arcs and shapes, not listed
  text "Projekt na PBL4: Smartwatch / Autorzy: Weronika Majcher,  / Antoni Pekała,  / Franciszek Zarebski /  / Opiekun: dr inz. Jerzy Kołakowski" at 29.269,16.274 h0.8
wyswietlacz:
  lines w0.2: 6.35,33.5 6.35,1.5 43.97,1.5 43.97,33.5 6.45,33.5

## Text inside footprints (layer, text, board x,y; h text height)
*1: Top Component Outline "Keep out Area" at 17.618,33.104 h0.38